# Altium PCB PCB1.PcbDoc
Units mm, origin at the board's own origin, x right, y up, seen from the top; angles counter-clockwise.
Board outline 71.8 x 63.2 mm, 2 copper layers (Top, Bottom), stack 0.498 mm thick; 2 components, 49 nets, 150 pads, 0 vias.
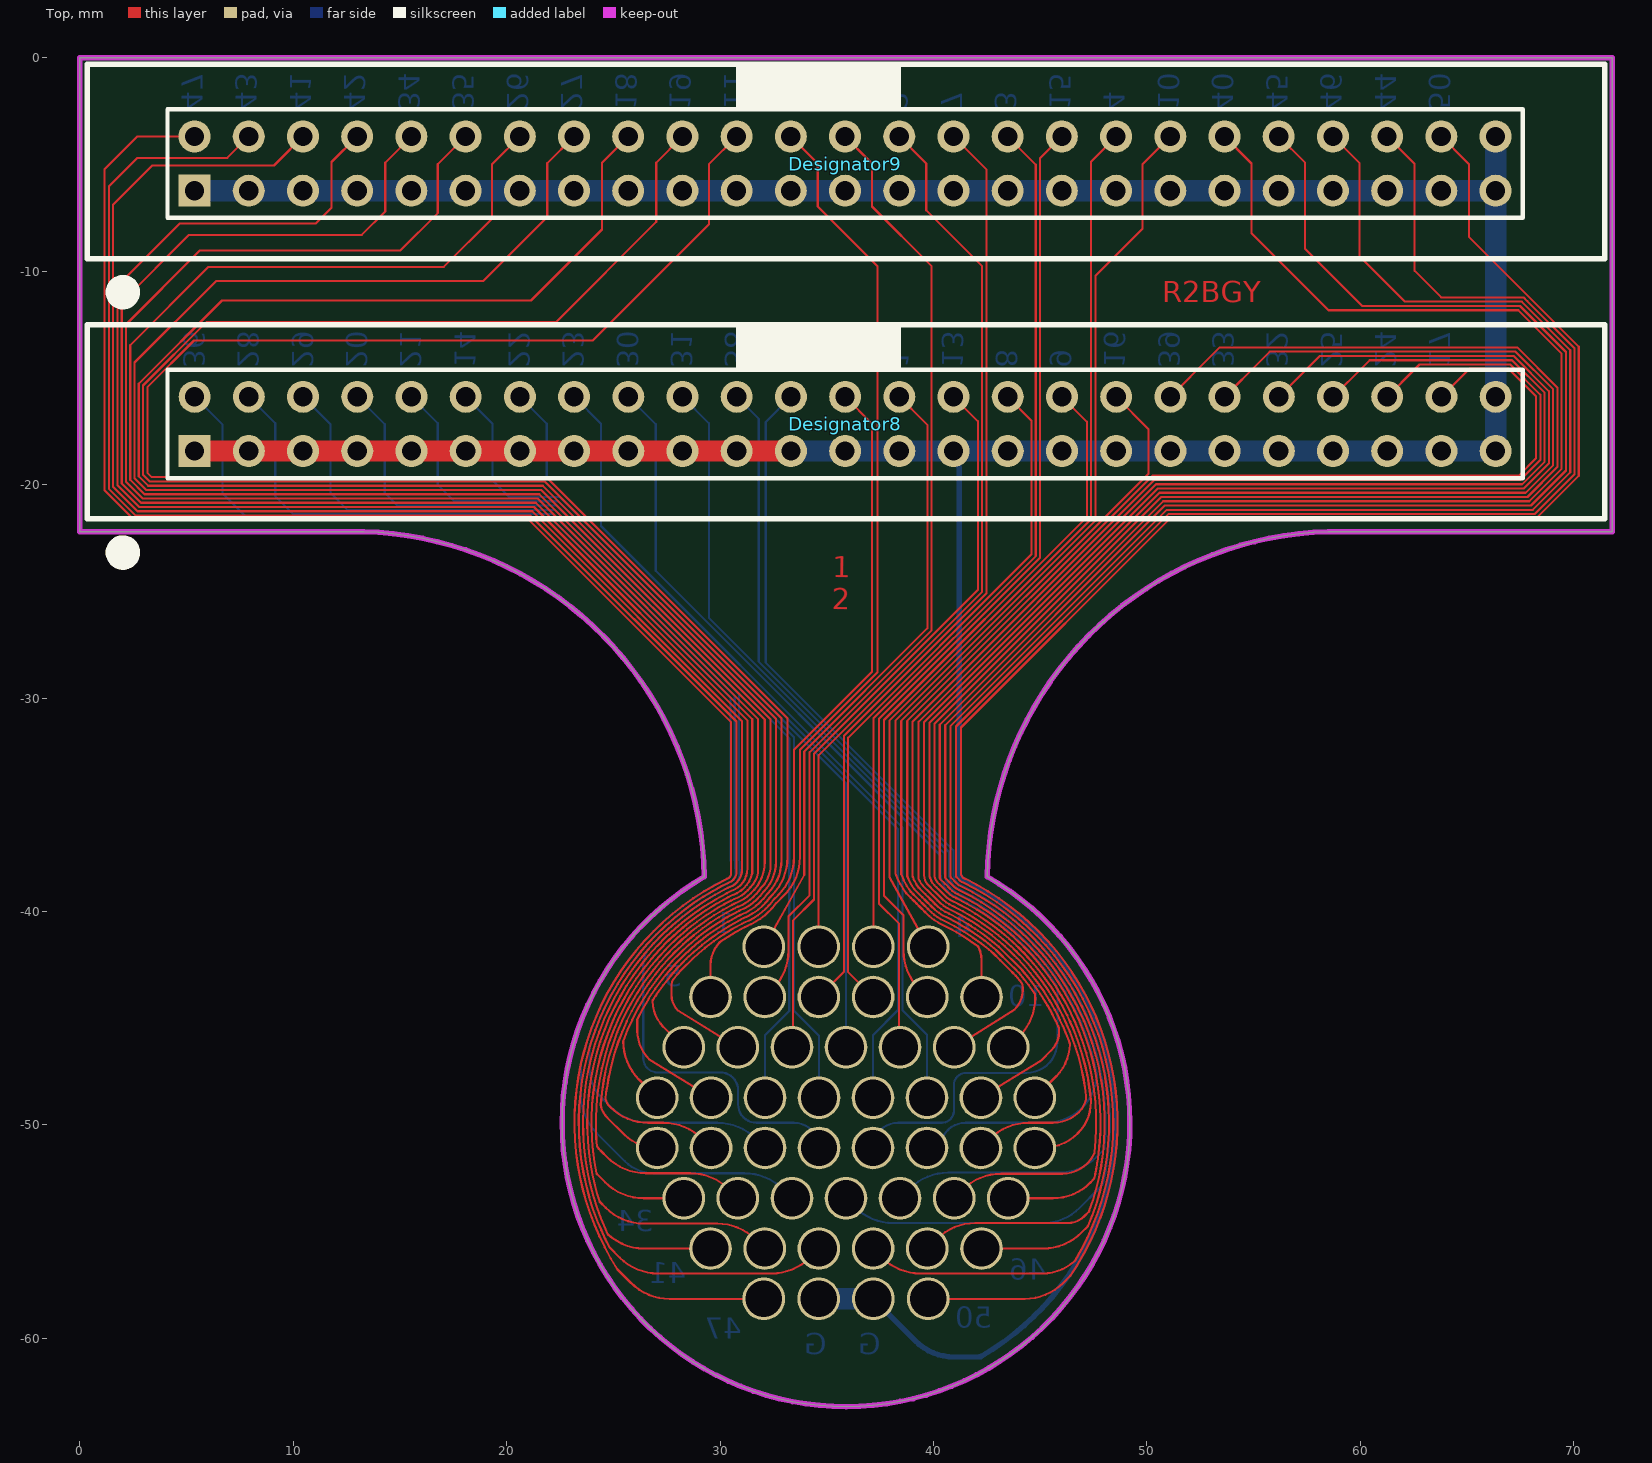
[diagram p0: Top view]
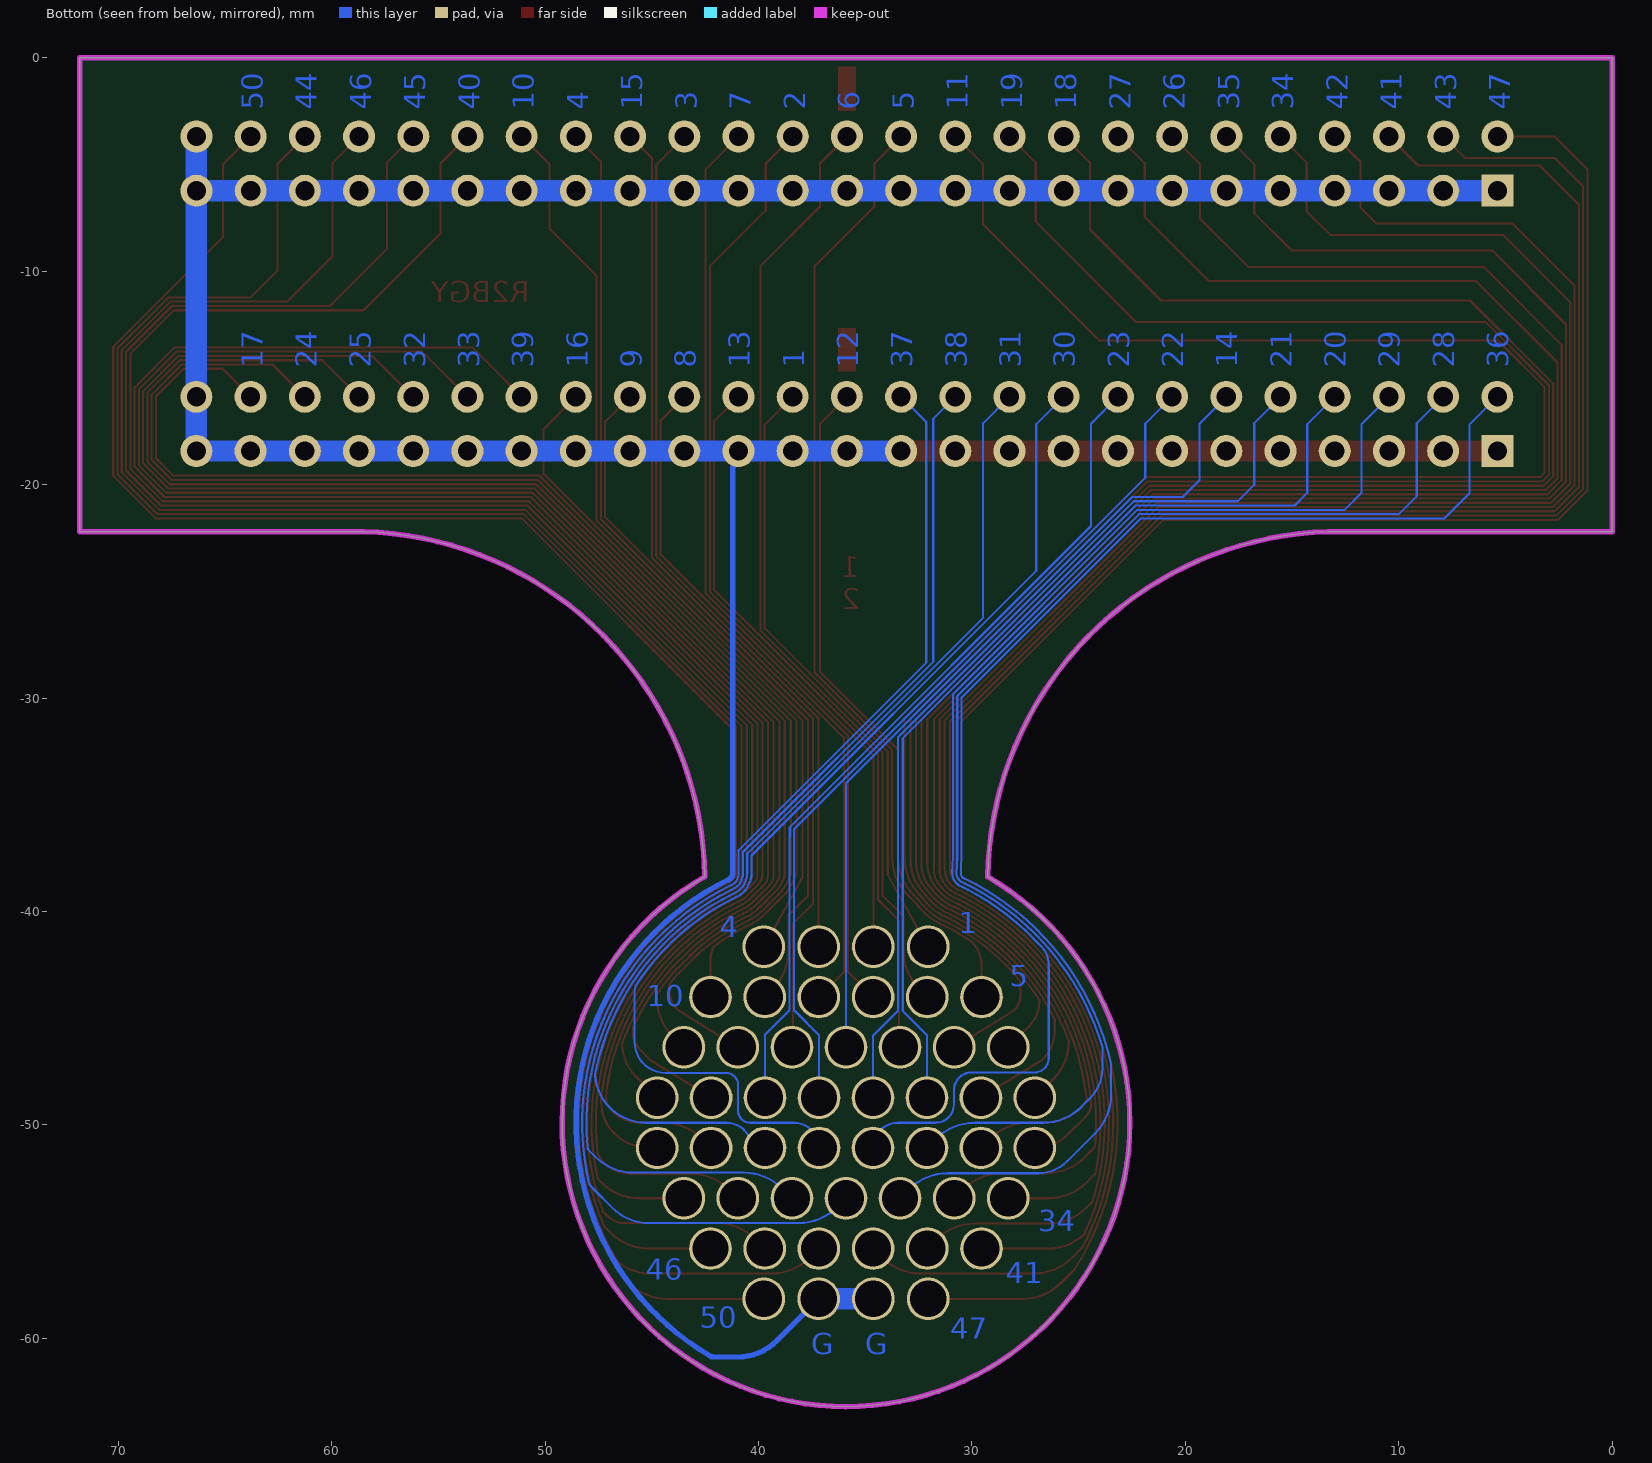
[diagram p1: Bottom view, seen from below]

## Layer stack, top to bottom
Top Solder: solder mask 0.0102, Solder Resist, Dk 3.5
Top: signal copper 0.018
Dielectric 2: prepreg 0.0711, PP-006, Dk 4.1
Dielectric 1: dielectric 0.32, FR-4, Dk 4.8
Dielectric 3: prepreg 0.0711, PP-006, Dk 4.1
Bottom: signal copper 0.018
Bottom Solder: solder mask 0.0102, Solder Resist, Dk 3.5

## Board outline
0,-22.2 0,0 71.8,0 71.8,-22.2 59.2,-22.2 ccw(c58.943,-38.622) 42.521,-38.365 cw(c35.9,-49.9) 29.256,-38.378 ccw(c12.839,-38.617) 12.6,-22.2

## Design rules (kind name [scope] priority, off if disabled: settings)
Clearance [All] p1: gap=0.1 ignorepadtopadclearanceinfootprint=FALSE
PolygonConnect [All] p1: connectstyle=Relief reliefconductorwidth=0.254 reliefentries=4 polygonreliefangle="90 Angle" airgapwidth=0.254
RoutingVias [All] p1: holewidth=0.711 width=1.27 viastyle="Through Hole" minholewidth=0.711 minwidth=1.27 maxholewidth=0.711 maxwidth=1.27
SolderMaskExpansion [All] p1: expansion=0.102 istentingtop=FALSE
Width [All] p1: maxlimit=2 minlimit=0.1 preferedwidth=0.254
30 further rules are at their usual default settings.

## Components (designator, comment, footprint, x,y, rotation, side; value= is the part's Value field where it differs from the comment)
Designator8 "Comment" IDC_DIO 5.379,-18.425 r0 top
Designator9 "Comment" IDC_DIO 5.375,-6.225 r0 top

## Footprints (in the part's own frame and the unit in brackets; to place one, negate y for a bottom-side part, rotate by r counter-clockwise, add the part's x,y. Pads: shape width x height; smd on the part's side, far side on the other; paste and mask are expansions set on the pad)
IDC_DIO [mm]
  rect 1.5x1.5 hole 0.9: 1(0,0)
  round 1.5 hole 0.9: 2(0,2.54) 3(2.54,0) 4(2.54,2.54) 5(5.08,0) 6(5.08,2.54) 7(7.62,0) 8(7.62,2.54) 9(10.16,0) 10(10.16,2.54) 11(12.7,0) 12(12.7,2.54) 13(15.24,0) 14(15.24,2.54) 15(17.78,0) 16(17.78,2.54) 17(20.32,0) 18(20.32,2.54) 19(22.86,0) 20(22.86,2.54) 21(25.4,0) 22(25.4,2.54) 23(27.94,0) 24(27.94,2.54) 25(30.48,0) 26(30.48,2.54) 27(33.02,0) 28(33.02,2.54) 29(35.56,0) 30(35.56,2.54) 31(38.1,0) 32(38.1,2.54) 33(40.64,0) 34(40.64,2.54) 35(43.18,0) 36(43.18,2.54) 37(45.72,0) 38(45.72,2.54) 39(48.26,0) 40(48.26,2.54) 41(50.8,0) 42(50.8,2.54) 43(53.34,0) 44(53.34,2.54) 45(55.88,0) 46(55.88,2.54) 47(58.42,0) 48(58.42,2.54) 49(60.96,0) 50(60.96,2.54)
  silkscreen extent -5.03,-5.14 66.07,5.92

## Free pads (board coordinates)
  round 2 hole 1.7: 1(32.05,-41.65) 2(34.617,-41.65) 3(37.183,-41.65) 4(39.75,-41.65) 5(29.55,-44.007) 6(32.09,-44.007) 7(34.63,-44.007) 8(37.17,-44.007) 9(39.71,-44.007) 10(42.25,-44.007) 11(28.3,-46.364) 12(30.833,-46.364) 13(33.367,-46.364) 14(35.9,-46.364) 15(38.433,-46.364) 16(40.967,-46.364) 17(43.5,-46.364) 18(27.05,-48.721) 19(29.579,-48.721) 20(32.107,-48.721) 21(34.636,-48.721) 22(37.164,-48.721) 23(39.693,-48.721) 24(42.221,-48.721) 25(44.75,-48.721) 26(27.05,-51.079) 27(29.579,-51.079) 28(32.107,-51.079) 29(34.636,-51.079) 30(37.164,-51.079) 31(39.693,-51.079) 32(42.221,-51.079) 33(44.75,-51.079) 34(28.3,-53.436) 35(30.833,-53.436) 36(33.367,-53.436) 37(35.9,-53.436) 38(38.433,-53.436) 39(40.967,-53.436) 40(43.5,-53.436) 41(29.55,-55.793) 42(32.09,-55.793) 43(34.63,-55.793) 44(37.17,-55.793) 45(39.71,-55.793) 46(42.25,-55.793) 47(32.05,-58.15) 48(34.617,-58.15) 49(37.183,-58.15) 50(39.75,-58.15)

## Nets (pads, with @x,y where several pads share a name; then routed paths per layer and width w, separated by ;. In a path a pad name is that pad's centre, name@x,y a point inside that pad or via, vN(x,y) a via of type N, cw(c..) or ccw(c..) an arc to the next point about the centre after c; other vN are vias at no path point)
1: Designator8.28 pad.1 | length 29.4
  Top w0.1: pad.1 33.944,-38.292 33.944,-32.501 39.713,-26.732 39.713,-17.199 Designator8.28@38.244,-15.73
2: Designator9.28 pad.2 | length 42.9
  Top w0.1: pad.2 34.617,-32.678 42.279,-25.016 42.279,-9.767 39.659,-7.147 39.659,-4.949 Designator9.28@38.252,-3.542
3: Designator9.32 pad.3 | length 42
  Top w0.1: pad.3 37.183,-30.959 44.793,-23.35 44.793,-5.003 Designator9.32@43.239,-3.449
4: Designator9.36 pad.4 | length 42.8
  Top w0.1: 37.944,-38.39 cw(c38.032,-38.343) 37.932,-38.343 37.932,-31.059 47.384,-21.607 47.384,-4.856 Designator9.36 ; 37.945,-38.391 pad.4
5: Designator9.24 pad.5 | length 45.4
  Top w0.1: pad.5 29.55,-42.52 cw(c31.111,-42.52) 29.977,-41.448 cw(c30.049,-41.517) 29.991,-41.435 cw(c35.9,-49.9) 30.353,-41.194 cw(c35.9,-49.9) 31.117,-40.752 ccw(c30.266,-39.053) 31.147,-40.736 cw(c35.9,-49.9) 31.218,-40.7 cw(c31.262,-40.79) 31.225,-40.697 ccw(c30.145,-37.903) 32.271,-40.013 cw(c32.341,-40.084) 32.274,-40.01 ccw(c30.098,-37.675) 32.648,-39.595 32.997,-39.246 ccw(c31.201,-37.45) 33.741,-37.45 33.741,-32.422 37.373,-28.79 37.373,-9.763 34.579,-6.969 34.579,-4.949 Designator9.24
6: Designator9.26 pad.6 | length 45.4
  Top w0.1: pad.6 32.464,-43.633 ccw(c30.668,-41.837) 33.208,-41.837 33.208,-40.223 34.198,-39.232 34.198,-32.53 39.913,-26.815 39.913,-9.763 37.119,-6.969 37.119,-4.949 Designator9.26@35.696,-3.526
7: Designator9.30 pad.7 | length 44.6
  Top w0.1: pad.7 35.802,-42.836 35.802,-31.775 42.479,-25.098 42.479,-5.229 Designator9.30@40.674,-3.424
8: Designator8.32 pad.8 | length 32.6
  Top w0.1: pad.8 36.002,-42.839 36.002,-31.858 44.593,-23.267 44.593,-16.999 Designator8.32
9: Designator8.34 pad.9 | length 33.5
  Top w0.1: pad.9 39.336,-43.633 cw(c41.132,-41.837) 38.592,-41.837 38.592,-40.172 37.678,-39.257 37.678,-31.03 47.184,-21.524 47.184,-17.05 Designator8.34@45.88,-15.746
10: Designator9.38 pad.10 | length 47.8
  Top w0.1: 39.191,-39.613 ccw(c39.618,-39.191) 39.196,-39.618 39.218,-39.64 ccw(c39.289,-39.57) 39.219,-39.641 39.365,-39.786 ; 39.19,-39.612 39.088,-39.51 38.942,-39.363 cw(c39.081,-39.22) 38.939,-39.361 ccw(c38.867,-39.431) 38.937,-39.359 cw(c39.076,-39.216) 38.934,-39.356 38.741,-39.163 38.738,-39.16 ccw(c38.666,-39.23) 38.736,-39.158 cw(c41.709,-36.904) 38.217,-38.218 cw(c38.311,-38.184) 38.211,-38.186 38.211,-31.063 47.584,-21.69 47.584,-10.225 49.794,-8.015 49.794,-4.986 Designator9.38@51.26,-3.52 ; 39.365,-39.787 cw(c39.293,-39.857) 39.366,-39.788 ccw(c40.754,-38.491) 39.39,-39.814 ccw(c39.683,-39.54) 39.4,-39.824 39.408,-39.832 cw(c39.338,-39.903) 39.41,-39.833 cw(c39.341,-39.906) 39.413,-39.836 39.568,-39.992 cw(c39.498,-40.063) 39.569,-39.993 ccw(c39.999,-39.574) 39.578,-40.001 39.613,-40.036 ccw(c40.04,-39.615) 39.616,-40.039 cw(c39.545,-40.11) 39.617,-40.041 ccw(c41.56,-38.199) 40.478,-40.648 cw(c40.437,-40.739) 40.48,-40.649 cw(c35.9,-49.9) 40.856,-40.844 cw(c35.9,-49.9) 41.302,-41.103 ccw(c41.517,-40.766) 41.307,-41.106 ccw(c42.221,-39.673) 41.349,-41.132 cw(c35.9,-49.9) 42.087,-41.636 cw(c42.026,-41.716) 42.116,-41.673 cw(c40.802,-42.28) 42.25,-42.28 pad.10
11: Designator9.22 pad.11 | length 91.7
  Top w0.1: pad.11 27.352,-45.417 cw(c28.611,-44.16) 26.833,-44.206 cw(c26.933,-44.205) 26.848,-44.152 cw(c35.9,-49.9) 26.974,-43.958 ccw(c26.826,-43.81) 27.016,-43.897 cw(c27.107,-43.939) 27.024,-43.884 cw(c35.9,-49.9) 28.028,-42.619 ccw(c27.157,-41.776) 28.062,-42.583 cw(c35.9,-49.9) 28.419,-42.218 cw(c35.9,-49.9) 29.155,-41.564 ccw(c28.592,-40.862) 29.162,-41.558 cw(c35.9,-49.9) 30.935,-40.396 ccw(c30.266,-39.053) 30.962,-40.382 cw(c35.9,-49.9) 31.055,-40.334 cw(c31.1,-40.424) 31.064,-40.33 ccw(c30.145,-37.903) 31.992,-39.726 cw(c32.063,-39.797) 31.995,-39.724 ccw(c30.098,-37.675) 32.34,-39.339 cw(c32.42,-39.399) 32.348,-39.33 ccw(c30.625,-37.661) 32.363,-39.314 32.413,-39.264 ccw(c30.617,-37.468) 33.157,-37.468 33.157,-30.943 32.377,-30.163 21.863,-19.649 3.365,-19.649 3.162,-19.446 3.162,-15.436 5.351,-13.248 24.038,-13.248 29.474,-7.812 29.474,-4.986 Designator9.22
12: Designator8.26 pad.12 | length 36.8
  Top w0.1: pad.12 28.026,-44.642 cw(c28.762,-43.906) 27.721,-43.906 27.721,-43.564 cw(c28.675,-43.564) 27.796,-43.194 cw(c27.888,-43.233) 27.811,-43.169 cw(c35.9,-49.9) 28.173,-42.757 ccw(c27.157,-41.776) 28.209,-42.718 28.717,-42.21 cw(c28.787,-42.281) 28.718,-42.209 cw(c35.9,-49.9) 29.28,-41.72 ccw(c28.592,-40.862) 29.288,-41.714 cw(c35.9,-49.9) 31.026,-40.574 ccw(c30.266,-39.053) 31.055,-40.559 cw(c35.9,-49.9) 31.136,-40.517 cw(c31.181,-40.607) 31.145,-40.513 ccw(c30.145,-37.903) 32.132,-39.87 cw(c32.202,-39.94) 32.134,-39.868 ccw(c30.098,-37.675) 32.496,-39.464 32.718,-39.242 ccw(c30.922,-37.446) 33.462,-37.446 33.462,-32.418 37.119,-28.761 37.119,-17.145 Designator8.26
13: Designator8.30 pad.13 | length 34.7
  Top w0.1: pad.13 33.411,-46.32 33.411,-40.426 34.401,-39.435 34.401,-32.61 42.079,-24.933 42.079,-17.024 Designator8.30@40.805,-15.751
14: Designator8.12 pad.14 | length 39.5
  Bottom w0.1: Designator8.12@17.933,-15.739 19.339,-17.145 19.339,-19.801 20.117,-20.579 22.495,-20.579 35.9,-33.984 pad.14
15: Designator9.34 pad.15 | length 46.6
  Top w0.1: pad.15 38.389,-46.32 38.389,-40.578 37.449,-39.638 37.449,-30.976 44.993,-23.432 44.993,-4.707 Designator9.34
16: Designator8.36 pad.16 | length 41
  Top w0.1: 39.36,-39.499 39.337,-39.476 cw(c39.618,-39.191) 39.333,-39.472 39.082,-39.221 ccw(c39.011,-39.292) 39.081,-39.22 39.078,-39.217 ccw(c39.007,-39.287) 39.076,-39.216 39.027,-39.166 38.92,-39.059 38.915,-39.054 cw(c41.395,-37.21) 38.491,-38.267 38.491,-31.066 50.073,-19.484 50.073,-17.399 Designator8.36 ; 39.361,-39.5 39.508,-39.647 cw(c39.437,-39.718) 39.51,-39.649 ccw(c40.754,-38.491) 39.536,-39.676 ccw(c39.683,-39.54) 39.542,-39.683 39.55,-39.691 ccw(c39.693,-39.551) 39.552,-39.693 ccw(c39.695,-39.553) 39.554,-39.694 ccw(c39.625,-39.625) 39.555,-39.696 39.711,-39.852 ccw(c39.999,-39.574) 39.718,-39.859 ; 39.719,-39.859 39.755,-39.895 ccw(c40.04,-39.615) 39.759,-39.9 39.76,-39.901 ccw(c41.56,-38.199) 40.185,-40.259 ccw(c41.56,-38.199) 40.563,-40.466 cw(c40.521,-40.558) 40.565,-40.467 cw(c35.9,-49.9) 41.408,-40.934 ccw(c41.517,-40.766) 41.413,-40.937 ccw(c42.221,-39.673) 41.453,-40.962 cw(c35.9,-49.9) 42.605,-41.79 cw(c35.9,-49.9) 42.785,-41.942 cw(c42.72,-42.018) 42.79,-41.947 43.13,-42.286 43.674,-42.831 ; pad.16@41.493,-45.838 pad.16 43.799,-44.591 43.803,-44.588 ccw(c42.893,-43.677) 44.18,-43.677 44.18,-43.552 ccw(c43.747,-43.552) 44.121,-43.332 ccw(c44.035,-43.384) 44.114,-43.322 ccw(c35.9,-49.9) 44.021,-43.208 ccw(c35.9,-49.9) 43.858,-43.015 ccw(c43.782,-43.08) 43.854,-43.01 43.675,-42.831
17: Designator8.48 pad.17 | length 62
  Top w0.1: 39.854,-39.712 39.695,-39.553 ccw(c39.623,-39.622) 39.693,-39.551 39.683,-39.54 ccw(c39.608,-39.607) 39.682,-39.539 ccw(c39.608,-39.607) 39.68,-39.538 cw(c40.754,-38.491) 39.677,-39.535 cw(c40.754,-38.491) 39.654,-39.51 ccw(c39.581,-39.579) 39.652,-39.508 39.478,-39.334 cw(c39.618,-39.191) 39.475,-39.331 39.222,-39.078 39.096,-38.952 cw(c41.085,-37.511) 38.77,-38.332 38.77,-31.07 50.261,-19.579 67.415,-19.579 68.234,-18.76 68.234,-15.864 66.939,-14.569 65.116,-14.569 Designator8.48@63.607,-16.077 ; 39.855,-39.712 ccw(c39.999,-39.574) 39.859,-39.717 39.897,-39.755 ; 39.897,-39.755 ccw(c40.04,-39.615) 39.901,-39.759 ccw(c40.045,-39.62) 39.903,-39.761 cw(c39.832,-39.832) 39.905,-39.762 ccw(c41.56,-38.199) 40.646,-40.285 cw(c40.606,-40.376) 40.65,-40.286 cw(c35.9,-49.9) 41.514,-40.764 ccw(c41.623,-40.596) 41.517,-40.766 ; 41.517,-40.766 cw(c41.466,-40.852) 41.519,-40.767 41.521,-40.769 ccw(c42.221,-39.673) 41.557,-40.791 cw(c35.9,-49.9) 41.895,-41.009 cw(c35.9,-49.9) 42.416,-41.384 ; 42.369,-41.348 cw(c35.9,-49.9) 42.922,-41.796 cw(c42.856,-41.871) 42.927,-41.801 43.616,-42.489 ; pad.17 44.021,-45.844 ccw(c42.225,-44.048) 44.765,-44.048 ccw(c43.257,-44.048) 44.754,-43.871 ccw(c44.655,-43.884) 44.738,-43.827 ccw(c35.9,-49.9) 44.175,-43.08 ccw(c35.9,-49.9) 44.004,-42.878 ccw(c43.929,-42.944) 44.002,-42.876 ccw(c43.929,-42.944) 44,-42.874 ; 43.999,-42.873 43.815,-42.689 ; 43.616,-42.489 43.815,-42.689 ; 43.616,-42.489 43.815,-42.689
18: Designator9.18 pad.18 | length 89.8
  Top w0.1: Designator9.18 24.47,-4.91 24.47,-8.041 21.143,-11.368 6.665,-11.368 2.762,-15.27 2.762,-19.612 3.199,-20.049 21.697,-20.049 32.623,-30.975 32.623,-37.661 cw(c30.625,-37.661) 32.038,-39.074 cw(c30.098,-37.675) 31.715,-39.438 cw(c30.145,-37.903) 30.904,-39.963 ccw(c30.939,-40.057) 30.894,-39.967 ccw(c35.9,-49.9) 30.776,-40.028 cw(c30.266,-39.053) 30.754,-40.039 ccw(c35.9,-49.9) 29.542,-40.773 ccw(c35.9,-49.9) 28.91,-41.248 cw(c28.592,-40.862) 28.904,-41.253 ccw(c35.9,-49.9) 27.766,-42.314 cw(c27.157,-41.776) 27.738,-42.344 ; pad.18 26.203,-47.875 cw(c28.001,-46.08) 25.461,-46.078 cw(c25.561,-46.079) 25.467,-46.044 cw(c35.9,-49.9) 26.132,-44.579 cw(c35.9,-49.9) 27.737,-42.345
19: Designator9.20 pad.19 | length 93
  Top w0.1: Designator9.20 27.01,-4.91 27.01,-7.685 22.311,-12.384 5.931,-12.384 2.962,-15.353 2.962,-19.529 3.282,-19.849 21.78,-19.849 32.295,-30.363 32.877,-30.946 32.877,-37.587 cw(c30.632,-37.587) 32.22,-39.174 cw(c30.625,-37.661) 32.195,-39.199 ccw(c32.267,-39.269) 32.187,-39.209 cw(c30.098,-37.675) 31.855,-39.58 ccw(c31.924,-39.653) 31.853,-39.582 cw(c30.145,-37.903) 30.983,-40.147 ccw(c31.019,-40.24) 30.975,-40.151 ccw(c35.9,-49.9) 30.869,-40.205 cw(c30.266,-39.053) 30.845,-40.217 ccw(c35.9,-49.9) 29.453,-41.083 ccw(c35.9,-49.9) 29.036,-41.403 cw(c28.592,-40.862) 29.028,-41.409 ccw(c35.9,-49.9) 27.914,-42.448 cw(c27.157,-41.776) 27.882,-42.482 ccw(c35.9,-49.9) 27.289,-43.18 ccw(c35.9,-49.9) 26.125,-45.025 ccw(c26.221,-45.054) 26.121,-45.054 26.121,-45.579 ccw(c28.029,-45.579) 26.68,-46.928 pad.19
20: Designator8.8 pad.20 | length 46.3
  Bottom w0.1: Designator8.8@12.835,-15.721 14.285,-17.17 14.285,-20.385 14.878,-20.979 22.329,-20.979 33.24,-31.89 33.24,-44.661 32.107,-45.793 pad.20
21: Designator8.10 pad.21 | length 43.9
  Bottom w0.1: Designator8.10@15.345,-15.691 16.774,-17.12 16.774,-20.004 17.549,-20.779 22.412,-20.779 33.467,-31.834 33.467,-44.647 34.636,-45.816 pad.21
22: Designator8.14 pad.22 | length 40.9
  Bottom w0.1: Designator8.14@20.472,-15.738 21.879,-17.145 21.879,-19.681 38.338,-36.14 38.338,-44.617 37.164,-45.791 pad.22
23: Designator8.16 pad.23 | length 39.7
  Bottom w0.1: Designator8.16 24.419,-17.145 24.419,-21.938 37.51,-35.029 38.538,-36.057 38.538,-36.486 38.542,-36.489 38.542,-44.617 39.693,-45.768 pad.23
24: Designator8.46 pad.24 | length 69.7
  Top w0.1: 39.363,-38.936 cw(c39.503,-38.793) 39.36,-38.933 39.31,-38.883 cw(c39.375,-38.816) 39.29,-38.854 ccw(c39.198,-38.895) 39.278,-38.835 cw(c40.597,-37.819) 39.03,-38.38 cw(c40.597,-37.819) 39.024,-38.364 39.024,-31.098 50.344,-19.779 67.498,-19.779 68.434,-18.842 68.434,-15.864 68.434,-15.781 67.022,-14.369 62.776,-14.369 Designator8.46@61.084,-16.06 ; 39.363,-38.937 39.617,-39.191 ; 39.618,-39.192 39.797,-39.371 ccw(c40.754,-38.491) 39.836,-39.411 39.997,-39.571 ; 39.997,-39.572 ccw(c40.14,-39.432) 39.998,-39.573 cw(c39.929,-39.645) 40,-39.575 40.039,-39.614 cw(c39.969,-39.685) 40.04,-39.615 40.042,-39.617 ccw(c40.185,-39.477) 40.045,-39.62 ; 40.045,-39.62 cw(c39.975,-39.692) 40.048,-39.623 ccw(c41.56,-38.199) 40.729,-40.102 cw(c40.69,-40.195) 40.734,-40.105 cw(c35.9,-49.9) 41.622,-40.596 ; 41.623,-40.596 cw(c41.571,-40.682) 41.624,-40.597 41.628,-40.6 ccw(c42.221,-39.673) 41.661,-40.619 cw(c35.9,-49.9) 41.823,-40.723 cw(c35.9,-49.9) 42.092,-40.902 cw(c35.9,-49.9) 42.643,-41.307 cw(c35.9,-49.9) 43.058,-41.649 cw(c42.992,-41.725) 43.062,-41.653 44.146,-42.737 cw(c44.075,-42.808) 44.15,-42.742 cw(c35.9,-49.9) 45.249,-44.252 ccw(c46.085,-43.851) 45.331,-44.39 cw(c45.25,-44.448) 45.336,-44.397 cw(c35.9,-49.9) 45.566,-44.813 ; pad.24@42.884,-48.059 pad.24 45.044,-46.979 45.523,-46.5 ccw(c44.656,-45.633) 45.882,-45.633 45.882,-45.512 ccw(c45.622,-45.512) 45.876,-45.457 ccw(c45.779,-45.479) 45.87,-45.438 ccw(c35.9,-49.9) 45.845,-45.383 ccw(c45.754,-45.425) 45.843,-45.378 45.831,-45.356 cw(c45.92,-45.309) 45.827,-45.347 45.816,-45.319 ccw(c45.723,-45.356) 45.814,-45.315 ccw(c35.9,-49.9) 45.734,-45.146 cw(c47.046,-44.419) 45.67,-45.016 ccw(c45.579,-45.057) 45.669,-45.013 ccw(c35.9,-49.9) 45.499,-44.687
25: Designator8.44 pad.25 | length 70.4
  Top w0.1: 40.14,-39.432 ccw(c40.068,-39.501) 40.139,-39.431 39.978,-39.27 cw(c40.754,-38.491) 39.943,-39.234 ccw(c39.87,-39.302) 39.94,-39.23 39.857,-39.148 39.503,-38.793 cw(c40.267,-38.117) 39.304,-38.453 39.304,-31.102 50.426,-19.979 67.58,-19.979 68.634,-18.925 68.634,-15.864 68.634,-15.698 67.104,-14.169 60.436,-14.169 Designator8.44@58.451,-16.153 ; 40.141,-39.433 40.181,-39.474 ccw(c40.324,-39.333) 40.183,-39.476 cw(c40.114,-39.547) 40.185,-39.477 40.188,-39.48 cw(c40.119,-39.552) 40.191,-39.483 ccw(c41.56,-38.199) 40.814,-39.921 cw(c40.774,-40.013) 40.817,-39.923 cw(c35.9,-49.9) 41.728,-40.426 cw(c41.675,-40.511) 41.73,-40.427 41.736,-40.431 ccw(c42.221,-39.673) 41.764,-40.448 cw(c35.9,-49.9) 42.743,-41.131 cw(c35.9,-49.9) 43.622,-41.895 cw(c43.553,-41.967) 43.624,-41.896 43.768,-42.04 ; 43.769,-42.041 ccw(c44.054,-41.76) 43.773,-42.045 43.903,-42.175 ; 43.903,-42.175 cw(c35.9,-49.9) 44.534,-42.888 cw(c35.9,-49.9) 45.423,-44.153 cw(c45.338,-44.205) 45.428,-44.161 ccw(c46.085,-43.851) 45.497,-44.279 cw(c45.417,-44.339) 45.503,-44.288 cw(c35.9,-49.9) 45.85,-44.928 cw(c45.76,-44.972) 45.852,-44.932 ccw(c47.046,-44.419) 45.911,-45.052 cw(c45.823,-45.1) 45.913,-45.055 cw(c35.9,-49.9) 46.191,-45.679 ccw(c46.377,-45.606) 46.192,-45.682 46.198,-45.696 ccw(c46.384,-45.623) 46.199,-45.7 46.2,-45.702 ccw(c46.386,-45.628) 46.201,-45.705 46.208,-45.72 cw(c46.116,-45.759) 46.208,-45.721 cw(c35.9,-49.9) 46.295,-45.942 cw(c35.9,-49.9) 46.384,-46.185 cw(c46.29,-46.218) 46.39,-46.219 cw(c44.242,-46.192) 45.761,-47.71 pad.25
26: Designator9.14 pad.26 | length 89.3
  Top w0.1: Designator9.14@20.769,-3.531 19.314,-4.986 19.314,-7.533 17.053,-9.793 6.03,-9.793 2.362,-13.461 2.362,-19.778 3.034,-20.449 21.532,-20.449 32.09,-31.007 32.09,-37.675 cw(c30.098,-37.675) 31.436,-39.15 cw(c30.145,-37.903) 30.746,-39.595 ccw(c30.78,-39.689) 30.736,-39.599 ccw(c35.9,-49.9) 30.591,-39.673 cw(c30.266,-39.053) 30.574,-39.682 ccw(c30.618,-39.772) 30.572,-39.683 ccw(c35.9,-49.9) 29.715,-40.177 ccw(c35.9,-49.9) 28.656,-40.939 cw(c28.592,-40.862) 28.653,-40.941 ccw(c35.9,-49.9) 27.469,-42.046 cw(c27.157,-41.776) 27.448,-42.068 ccw(c35.9,-49.9) 26.646,-43.034 ccw(c35.9,-49.9) 25.667,-44.602 ccw(c35.9,-49.9) 24.658,-47.369 ccw(c35.9,-49.9) 24.409,-49.048 ccw(c24.508,-49.054) 24.41,-49.07 ccw(c25.498,-48.884) 24.716,-49.664 25.481,-50.429 ccw(c27.05,-48.86) pad.26
27: Designator9.16 pad.27 | length 93
  Top w0.1: Designator9.16 21.905,-4.935 21.905,-7.457 18.907,-10.454 6.385,-10.454 2.562,-14.277 2.562,-19.695 3.116,-20.249 21.614,-20.249 32.369,-31.004 32.369,-37.81 cw(c30.84,-37.81) 31.922,-38.891 cw(c30.098,-37.675) 31.577,-39.292 ccw(c31.645,-39.366) 31.574,-39.295 cw(c30.145,-37.903) 30.825,-39.779 ccw(c30.859,-39.873) 30.815,-39.783 ccw(c35.9,-49.9) 30.683,-39.851 cw(c30.266,-39.053) 30.663,-39.861 ccw(c35.9,-49.9) 29.596,-40.494 ccw(c35.9,-49.9) 28.783,-41.093 cw(c28.592,-40.862) 28.778,-41.097 ccw(c35.9,-49.9) 28.271,-41.533 ccw(c35.9,-49.9) 27.618,-42.179 ccw(c27.692,-42.246) 27.617,-42.18 cw(c27.157,-41.776) 27.592,-42.206 ccw(c35.9,-49.9) 26.668,-43.344 ccw(c35.9,-49.9) 25.86,-44.664 ccw(c35.9,-49.9) 25.229,-46.113 ccw(c35.9,-49.9) 24.692,-48.288 ccw(c35.9,-49.9) 24.636,-48.748 ccw(c24.735,-48.757) 24.637,-48.776 ccw(c25.358,-48.63) 24.839,-49.151 24.851,-49.163 ccw(c26.629,-47.385) 26.629,-49.9 27.348,-49.9 cw(c27.348,-52.44) 29.144,-50.644 pad.27
28: Designator8.4 pad.28 | length 61
  Bottom w0.1: Designator8.4@7.792,-15.758 9.154,-17.12 9.154,-20.538 9.995,-21.379 22.163,-21.379 30.688,-29.904 30.688,-37.457 ccw(c30.788,-37.456) 30.688,-37.462 cw(c13.311,-38.573) 30.719,-38.191 cw(c30.242,-38.201) 30.392,-38.654 ccw(c30.424,-38.749) 30.381,-38.659 ccw(c35.9,-49.9) 24.436,-44.86 ccw(c35.9,-49.9) 23.89,-46.353 ccw(c23.986,-46.381) 23.886,-46.38 23.886,-47.347 ccw(c25.88,-47.347) 24.47,-48.757 24.869,-49.156 ccw(c26.665,-47.36) 26.665,-49.9 29.876,-49.9 cw(c29.876,-52.44) 31.673,-50.644 pad.28
29: Designator8.6 pad.29 | length 58.5
  Bottom w0.1: Designator8.6@10.292,-15.718 11.745,-17.17 11.745,-20.385 12.538,-21.179 22.246,-21.179 30.888,-29.821 30.888,-37.45 ccw(c30.988,-37.45) 30.888,-37.455 cw(c13.311,-38.573) 30.919,-38.186 cw(c30.242,-38.201) 30.467,-38.84 ccw(c30.501,-38.934) 30.458,-38.844 ccw(c35.9,-49.9) 30.186,-38.982 ccw(c35.9,-49.9) 27.505,-40.879 ccw(c27.573,-40.952) 27.503,-40.88 26.881,-41.503 ; 26.88,-41.504 ccw(c35.9,-49.9) 26.638,-41.772 ccw(c26.713,-41.837) 26.631,-41.781 ccw(c27.747,-42.534) 26.4,-42.534 26.4,-46.877 ccw(c27.061,-46.877) 27.061,-47.538 30.007,-47.538 cw(c30.007,-48.376) 30.845,-48.376 30.845,-49.036 ccw(c31.709,-49.036) 31.709,-49.9 33.457,-49.9 cw(c33.457,-51.079) pad.29
30: Designator8.18 pad.30 | length 51
  Bottom w0.1: Designator8.18@25.53,-15.716 26.985,-17.17 26.985,-24.032 40.329,-37.376 40.329,-37.679 ccw(c40.829,-37.68) 40.329,-37.68 40.329,-38.184 ccw(c41.56,-38.199) 41.071,-39.329 41.084,-39.334 ; pad.30 cw(c38.343,-51.079) 38.343,-49.9 40.396,-49.9 ccw(c40.396,-49.341) 40.955,-49.341 40.955,-48.132 cw(c41.523,-48.132) 41.523,-47.563 44.358,-47.563 ccw(c44.358,-46.115) 45.806,-46.115 45.806,-43.779 ccw(c44.841,-43.779) 45.763,-43.494 45.758,-43.479 ccw(c45.663,-43.509) 45.747,-43.454 ccw(c35.9,-49.9) 44.497,-41.862 ccw(c35.9,-49.9) 44.38,-41.739 44.061,-41.42 ccw(c35.9,-49.9) 41.088,-39.336 ccw(c41.044,-39.426) 41.084,-39.334
31: Designator8.20 pad.31 | length 49.5
  Bottom w0.1: Designator8.20 29.474,-17.12 29.474,-26.238 40.529,-37.293 40.529,-37.679 ; pad.31 40.225,-51.079 40.263,-51.079 40.291,-51.054 ccw(c40.225,-50.979) pad.31@40.301,-51.044 ; pad.31@40.302,-51.043 40.321,-51.02 40.325,-50.989 ccw(c40.225,-50.979) 40.325,-50.987 cw(c41.5,-51.079) 41.5,-49.9 45.273,-49.9 ccw(c45.273,-47.512) 47.655,-47.665 ccw(c47.556,-47.659) 47.654,-47.64 ccw(c35.9,-49.9) 47.321,-46.319 ccw(c35.9,-49.9) 43.638,-40.769 ccw(c35.9,-49.9) 41.17,-39.154 ccw(c41.127,-39.244) 41.165,-39.152 cw(c41.56,-38.199) 40.529,-38.185 40.529,-37.68
32: Designator8.42 pad.32 | length 78.8
  Top w0.1: 40.31,-39.319 ccw(c40.595,-39.039) 40.313,-39.323 40.324,-39.333 cw(c40.254,-39.405) 40.325,-39.334 40.333,-39.342 cw(c40.262,-39.413) 40.335,-39.344 ccw(c41.56,-38.199) 40.888,-39.736 40.896,-39.739 cw(c40.856,-39.831) 40.897,-39.74 cw(c40.858,-39.832) 40.902,-39.742 cw(c35.9,-49.9) 41.835,-40.257 ; 40.31,-39.319 40.119,-39.128 cw(c40.754,-38.491) 40.088,-39.096 ccw(c40.014,-39.163) 40.085,-39.092 39.717,-38.725 39.714,-38.722 cw(c40.237,-38.287) 39.558,-38.314 cw(c39.658,-38.311) 39.558,-38.312 39.558,-31.131 50.509,-20.179 67.663,-20.179 68.834,-19.008 68.834,-15.864 68.834,-15.615 67.187,-13.969 58.096,-13.969 Designator8.42@55.844,-16.22 ; 41.836,-40.258 41.843,-40.262 ccw(c42.221,-39.673) 41.868,-40.277 cw(c35.9,-49.9) 43.763,-41.752 cw(c43.693,-41.824) 43.764,-41.753 43.91,-41.9 ; pad.32 42.656,-50.644 cw(c44.452,-52.44) 44.452,-49.9 45.596,-49.9 ccw(c45.596,-48.166) 46.822,-49.392 46.847,-49.367 ccw(c46.11,-48.63) 47.152,-48.641 ccw(c47.052,-48.641) 47.152,-48.63 ccw(c35.9,-49.9) 47.102,-48.25 ccw(c35.9,-49.9) 46.639,-46.312 ccw(c35.9,-49.9) 46.393,-45.645 46.386,-45.628 cw(c46.478,-45.589) 46.385,-45.627 46.384,-45.623 46.377,-45.606 ccw(c46.284,-45.642) 46.377,-45.605 ccw(c35.9,-49.9) 46.09,-44.963 ccw(c46,-45.007) 46.087,-44.958 cw(c47.046,-44.419) 46.033,-44.846 ccw(c35.9,-49.9) 45.671,-44.177 ccw(c45.585,-44.229) 45.665,-44.169 cw(c46.085,-43.851) 45.605,-44.069 ccw(c45.515,-44.111) 45.6,-44.059 ccw(c35.9,-49.9) 45.386,-43.718 ccw(c35.9,-49.9) 44.046,-42.036 ; 43.911,-41.901 ccw(c44.054,-41.76) 43.914,-41.903 44.046,-42.036
33: Designator8.40 pad.33 | length 80
  Top w0.1: 40.137,-38.862 40.041,-38.766 cw(c40.595,-38.211) 39.811,-38.211 39.811,-31.16 50.592,-20.379 67.746,-20.379 69.034,-19.091 69.034,-15.864 69.034,-15.533 67.27,-13.769 55.756,-13.769 Designator8.40@53.212,-16.312 ; 40.138,-38.862 ccw(c40.28,-38.722) 40.14,-38.865 40.23,-38.955 cw(c40.159,-39.025) 40.233,-38.958 ccw(c40.754,-38.491) 40.26,-38.986 40.452,-39.178 ccw(c40.595,-39.039) 40.454,-39.181 40.466,-39.193 40.476,-39.203 cw(c40.406,-39.274) 40.479,-39.205 ccw(c41.56,-38.199) 40.967,-39.552 40.982,-39.558 cw(c40.942,-39.65) 40.986,-39.56 cw(c35.9,-49.9) 41.519,-39.84 cw(c35.9,-49.9) 41.941,-40.087 cw(c41.888,-40.172) 41.942,-40.088 41.952,-40.094 ccw(c42.221,-39.673) 41.97,-40.105 cw(c41.919,-40.192) 41.971,-40.106 cw(c35.9,-49.9) 43.545,-41.278 cw(c35.9,-49.9) 43.903,-41.61 cw(c43.834,-41.682) 43.905,-41.611 43.98,-41.687 ; 43.981,-41.688 44.052,-41.759 cw(c43.982,-41.83) 44.054,-41.76 44.189,-41.896 cw(c35.9,-49.9) 45.778,-43.967 cw(c45.692,-44.018) 45.784,-43.979 ccw(c46.085,-43.851) 45.828,-44.053 cw(c45.751,-44.116) 45.837,-44.065 cw(c35.9,-49.9) 46.213,-44.761 cw(c46.124,-44.805) 46.216,-44.765 ccw(c47.046,-44.419) 46.26,-44.858 ccw(c46.348,-44.81) 46.262,-44.861 46.264,-44.864 cw(c46.177,-44.914) 46.267,-44.869 cw(c35.9,-49.9) 46.537,-45.468 cw(c35.9,-49.9) 46.562,-45.53 46.57,-45.549 ccw(c46.663,-45.512) 46.57,-45.55 46.578,-45.569 cw(c35.9,-49.9) 47.3,-48.221 cw(c35.9,-49.9) 47.38,-48.908 cw(c47.281,-48.916) 47.381,-48.917 cw(c45.235,-48.884) 46.752,-50.402 46.746,-50.408 cw(c45.127,-48.789) 45.127,-51.079 pad.33
34: Designator9.10 pad.34 | length 89.7
  Top w0.1: Designator9.10@15.682,-3.538 14.31,-4.91 14.31,-7.203 13.218,-8.295 5.115,-8.295 1.962,-11.448 1.962,-19.943 2.868,-20.849 21.366,-20.849 31.509,-30.991 31.509,-38.198 cw(c30.145,-37.903) 30.592,-39.225 ccw(c30.625,-39.32) 30.58,-39.23 ccw(c35.9,-49.9) 30.405,-39.319 cw(c30.266,-39.053) 30.396,-39.324 ccw(c30.438,-39.414) 30.393,-39.325 ccw(c35.9,-49.9) 30.357,-39.344 ccw(c35.9,-49.9) 23.982,-50.239 ; 23.982,-50.241 ccw(c35.9,-49.9) 24.004,-50.702 ccw(c35.9,-49.9) 24.213,-52.262 ccw(c24.311,-52.241) 24.24,-52.311 24.62,-52.692 ccw(c26.416,-50.896) 26.416,-53.436 pad.34 ; 24,-50.632 cw(c24.099,-50.62) 23.999,-50.627
35: Designator9.12 pad.35 | length 93.1
  Top w0.1: Designator9.12@18.233,-3.527 16.774,-4.986 16.774,-7.279 15.021,-9.031 5.623,-9.031 2.162,-12.492 2.162,-19.86 2.951,-20.649 21.449,-20.649 31.785,-30.985 31.785,-38.028 cw(c30.658,-38.028) 31.455,-38.826 31.428,-38.852 ccw(c31.5,-38.923) 31.42,-38.862 cw(c30.145,-37.903) 30.669,-39.41 ccw(c30.702,-39.504) 30.658,-39.415 ccw(c35.9,-49.9) 30.498,-39.496 cw(c30.266,-39.053) 30.483,-39.504 ccw(c35.9,-49.9) 29.914,-39.821 ccw(c35.9,-49.9) 24.184,-50.314 ccw(c24.284,-50.309) 24.188,-50.338 24.188,-50.416 ccw(c35.9,-49.9) 24.193,-50.516 ccw(c24.293,-50.509) 24.2,-50.545 24.2,-50.628 ccw(c35.9,-49.9) 24.226,-50.973 ccw(c24.326,-50.962) 24.236,-51.006 ; 24.236,-51.007 ccw(c24.62,-50.814) 24.316,-51.118 24.445,-51.246 24.717,-51.518 ccw(c26.513,-49.722) 26.513,-52.262 28.608,-52.262 cw(c28.608,-54.802) 30.404,-53.006 pad.35
36: Designator8.2 pad.36 | length 66.5
  Bottom w0.1: Designator8.2 6.69,-17.196 6.69,-20.411 7.858,-21.579 22.08,-21.579 30.488,-29.986 30.488,-37.463 ccw(c30.588,-37.462) 30.488,-37.468 cw(c13.311,-38.573) 30.519,-38.196 cw(c30.242,-38.201) 30.321,-38.467 ccw(c30.35,-38.563) 30.307,-38.472 ccw(c35.9,-49.9) 28.902,-39.275 ccw(c35.9,-49.9) 23.832,-45.869 ccw(c35.9,-49.9) 23.803,-45.957 ccw(c35.9,-49.9) 23.482,-47.132 ccw(c23.579,-47.154) 23.479,-47.153 23.479,-48.594 ccw(c26.019,-48.594) 24.222,-50.389 25.537,-51.703 ccw(c26.886,-50.354) 26.886,-52.262 31.141,-52.262 cw(c31.141,-54.802) 32.937,-53.006 pad.36
37: Designator8.24 pad.37 | length 57
  Bottom w0.1: Designator8.24 32.141,-17.063 32.141,-28.339 40.929,-37.128 40.929,-38.188 ccw(c41.56,-38.199) 41.328,-38.786 cw(c41.29,-38.879) 41.333,-38.788 cw(c35.9,-49.9) 47.92,-46.983 cw(c35.9,-49.9) 48.267,-49.685 48.267,-50.115 cw(c35.9,-49.9) 47.934,-52.76 cw(c47.837,-52.736) 47.915,-52.798 cw(c45.933,-51.21) 47.729,-53.006 46.847,-53.888 cw(c45.13,-52.171) 45.13,-54.599 38.115,-54.599 cw(c38.115,-52.059) 36.319,-53.855 pad.37
38: Designator8.22 pad.38 | length 52.5
  Bottom w0.1: Designator8.22 31.811,-16.916 31.811,-28.292 40.729,-37.211 40.729,-37.679 ; pad.38 38.888,-52.981 cw(c40.684,-54.777) 40.684,-52.237 45.846,-52.237 ccw(c45.846,-49.697) 47.642,-51.493 47.979,-51.156 ccw(c47.908,-51.086) 48.007,-51.101 48.014,-51.054 ; 40.729,-37.68 40.729,-38.187 ccw(c41.56,-38.199) 41.247,-38.969 cw(c41.209,-39.061) 41.252,-38.971 cw(c35.9,-49.9) 44.209,-41.009 cw(c35.9,-49.9) 47.334,-45.735 cw(c35.9,-49.9) 48.067,-49.686 48.067,-50.114 cw(c35.9,-49.9) 48.066,-50.167 cw(c47.966,-50.164) 48.065,-50.177 48.058,-50.23 ccw(c48.158,-50.243) 48.058,-50.243 48.058,-50.427 cw(c35.9,-49.9) 48.019,-50.998 cw(c47.92,-50.989) 48.019,-51.001 48.016,-51.025 ccw(c48.115,-51.037) 48.015,-51.036 cw(c47.915,-51.036) 48.015,-51.044 cw(c35.9,-49.9) 48.015,-51.049 cw(c47.915,-51.039) 48.014,-51.054
39: Designator8.38 pad.39 | length 88.7
  Top w0.1: 40.28,-38.722 40.183,-38.625 cw(c40.525,-38.282) 40.04,-38.282 40.04,-38.146 40.04,-31.214 50.675,-20.579 67.829,-20.579 69.234,-19.174 69.234,-15.864 69.234,-15.45 67.353,-13.569 53.416,-13.569 Designator8.38@50.716,-16.268 ; 40.281,-38.723 40.375,-38.817 cw(c40.304,-38.888) 40.379,-38.821 40.382,-38.825 ccw(c40.754,-38.491) 40.401,-38.845 40.594,-39.038 ; 40.595,-39.039 40.62,-39.064 cw(c40.55,-39.135) 40.623,-39.066 ccw(c41.56,-38.199) 41.067,-39.377 cw(c35.9,-49.9) 42.047,-39.918 ccw(c42.102,-39.834) 42.049,-39.919 42.06,-39.926 ccw(c42.221,-39.673) 42.072,-39.933 cw(c42.022,-40.02) 42.074,-39.935 cw(c35.9,-49.9) 43.146,-40.685 cw(c35.9,-49.9) 44.049,-41.473 cw(c43.979,-41.544) 44.051,-41.474 44.057,-41.481 44.332,-41.756 cw(c35.9,-49.9) 44.881,-42.366 cw(c35.9,-49.9) 45.958,-43.878 cw(c45.872,-43.929) 45.966,-43.895 ccw(c46.085,-43.851) 45.996,-43.941 cw(c35.9,-49.9) 46.396,-44.678 cw(c46.306,-44.722) 46.398,-44.683 ccw(c47.046,-44.419) 46.435,-44.76 46.441,-44.771 cw(c46.354,-44.821) 46.444,-44.776 cw(c35.9,-49.9) 46.846,-45.704 cw(c35.9,-49.9) 47.154,-46.618 cw(c35.9,-49.9) 47.621,-50.139 ccw(c47.882,-50.15) 47.62,-50.15 cw(c35.9,-49.9) 47.538,-51.307 cw(c47.439,-51.294) 47.532,-51.331 cw(c46.286,-50.814) 47.24,-51.768 47.203,-51.805 cw(c46.039,-50.641) 46.039,-52.287 43.558,-52.287 cw(c43.559,-52.187) 43.555,-52.287 ccw(c43.5,-53.436) 43.444,-52.287 ccw(c43.5,-53.436) 43.436,-52.287 ; pad.39 41.371,-53.032 cw(c43.167,-54.828) 43.167,-52.288 43.432,-52.288
40: Designator9.40 pad.40 | length 90.3
  Top w0.1: pad.40 45.601,-53.436 ccw(c45.601,-50.99) 47.33,-52.72 47.458,-52.591 ccw(c47.155,-52.288) 47.537,-52.483 ccw(c47.447,-52.439) 47.545,-52.461 ccw(c35.9,-49.9) 47.58,-52.296 ccw(c47.482,-52.277) 47.582,-52.278 47.582,-52.275 cw(c47.682,-52.275) 47.585,-52.25 47.595,-52.208 ccw(c47.498,-52.184) 47.596,-52.206 47.6,-52.19 47.609,-52.147 ccw(c47.512,-52.125) 47.61,-52.145 ccw(c35.9,-49.9) 47.627,-52.051 47.629,-52.042 47.631,-52.028 ccw(c35.9,-49.9) 47.703,-51.589 ccw(c47.604,-51.576) 47.704,-51.576 47.704,-51.564 cw(c47.804,-51.564) 47.706,-51.543 47.714,-51.505 ccw(c47.616,-51.484) 47.715,-51.498 ccw(c35.9,-49.9) 47.737,-51.329 ccw(c35.9,-49.9) 47.595,-47.577 ccw(c35.9,-49.9) 46.62,-44.682 ccw(c46.531,-44.726) 46.616,-44.674 cw(c47.046,-44.419) 46.581,-44.602 ccw(c46.488,-44.64) 46.578,-44.596 ccw(c35.9,-49.9) 45.586,-42.947 ccw(c35.9,-49.9) 43.621,-40.815 ccw(c35.9,-49.9) 42.174,-39.761 cw(c42.221,-39.673) 42.167,-39.757 42.154,-39.749 ccw(c35.9,-49.9) 41.151,-39.196 ccw(c41.108,-39.286) 41.146,-39.193 cw(c41.56,-38.199) 40.767,-38.928 ccw(c40.694,-38.996) 40.764,-38.925 40.543,-38.704 cw(c40.754,-38.491) 40.531,-38.691 40.524,-38.684 ccw(c40.449,-38.75) 40.52,-38.679 40.323,-38.483 cw(c40.394,-38.412) 40.294,-38.412 40.294,-31.243 50.758,-20.779 67.912,-20.779 69.434,-19.257 69.434,-13.864 67.396,-11.825 58.506,-11.825 54.899,-8.219 54.899,-4.949 Designator9.40@53.452,-3.502
41: Designator9.6 pad.41 | length 90.1
  Top w0.1: Designator9.6@10.661,-3.479 9.096,-5.044 3.388,-5.044 1.562,-6.869 1.562,-17.058 1.562,-20.109 2.702,-21.249 21.2,-21.249 31.023,-31.072 31.023,-38.054 cw(c30.199,-38.062) 30.451,-38.847 ccw(c35.9,-49.9) 30.297,-38.925 ccw(c35.9,-49.9) 23.589,-50.437 ; 23.582,-50.252 ccw(c35.9,-49.9) 23.589,-50.437 ; pad.41 26.452,-55.793 cw(c26.452,-53.278) 24.749,-55.129 cw(c24.818,-55.056) 24.728,-55.099 cw(c35.9,-49.9) 24.626,-54.875 cw(c35.9,-49.9) 23.604,-50.713 cw(c35.9,-49.9) 23.589,-50.445 ; 23.589,-50.445 cw(c35.9,-49.9) 23.589,-50.437 ; 23.589,-50.445 23.589,-50.437
42: Designator9.8 pad.42 | length 93
  Top w0.1: Designator9.8 11.795,-4.885 11.795,-7.025 11.059,-7.761 4.683,-7.761 1.762,-10.682 1.762,-20.026 2.785,-21.049 21.283,-21.049 31.277,-31.043 31.277,-37.98 cw(c30.174,-37.989) 30.515,-39.039 ccw(c35.9,-49.9) 30.312,-39.142 cw(c30.266,-39.053) 30.309,-39.144 ccw(c30.394,-39.325) 30.302,-39.147 ccw(c35.9,-49.9) 23.812,-48.98 ccw(c35.9,-49.9) 23.789,-50.431 ; 23.782,-50.246 ccw(c35.9,-49.9) 24.14,-52.846 ccw(c35.9,-49.9) 24.346,-53.571 ccw(c24.441,-53.54) 24.37,-53.61 24.641,-53.881 ccw(c26.437,-52.084) 26.437,-54.624 29.869,-54.624 cw(c29.869,-57.164) 31.665,-55.368 pad.42
43: Designator9.4 pad.43 | length 94.4
  Top w0.1: Designator9.4@8.206,-3.394 6.912,-4.688 2.702,-4.688 1.362,-6.028 1.362,-20.192 2.619,-21.449 21.117,-21.449 30.769,-31.101 30.769,-38.124 cw(c30.222,-38.135) 30.381,-38.659 ccw(c35.9,-49.9) 30.077,-38.813 ccw(c35.9,-49.9) 28.798,-39.585 ccw(c35.9,-49.9) 24.912,-43.892 ccw(c35.9,-49.9) 24.264,-54.53 ccw(c35.9,-49.9) 24.814,-55.724 ccw(c24.902,-55.677) 24.83,-55.747 25.301,-56.217 ccw(c27.097,-54.421) 27.097,-56.961 32.41,-56.961 ccw(c32.41,-54.421) 34.206,-56.217 pad.43
44: Designator9.46 pad.44 | length 93.8
  Top w0.1: pad.44 37.594,-56.217 ccw(c39.39,-54.421) 39.39,-56.961 45.101,-56.961 ccw(c45.101,-54.706) 46.611,-56.38 ccw(c46.543,-56.307) 46.629,-56.359 ccw(c35.9,-49.9) 41.392,-38.646 cw(c41.56,-38.199) 41.202,-38.515 ccw(c41.129,-38.582) 41.199,-38.511 41.085,-38.398 cw(c41.156,-38.327) 41.056,-38.327 41.056,-31.329 51.006,-21.379 68.16,-21.379 70.034,-19.505 70.034,-13.615 67.82,-11.401 67.645,-11.225 63.789,-11.225 62.545,-9.981 62.545,-4.975 Designator9.46
45: Designator9.42 pad.45 | length 93.6
  Top w0.1: pad.45 40.16,-55.343 cw(c41.956,-57.139) 41.956,-54.599 46.279,-54.599 ccw(c46.279,-53.472) 47.076,-54.269 47.273,-54.072 ccw(c47.202,-54.002) 47.296,-54.036 ccw(c35.9,-49.9) 47.616,-53.014 ccw(c35.9,-49.9) 47.616,-46.785 ccw(c35.9,-49.9) 46.796,-44.586 ccw(c46.707,-44.63) 46.792,-44.578 cw(c47.046,-44.419) 46.767,-44.529 46.763,-44.518 46.761,-44.514 ccw(c35.9,-49.9) 42.719,-39.876 ccw(c35.9,-49.9) 41.233,-39.013 ccw(c41.19,-39.103) 41.229,-39.011 41.217,-39.006 cw(c41.56,-38.199) 40.911,-38.789 ; 40.911,-38.789 40.683,-38.561 cw(c40.754,-38.491) 40.68,-38.558 40.669,-38.545 ccw(c40.595,-38.612) 40.665,-38.542 40.577,-38.454 cw(c40.648,-38.383) 40.548,-38.383 40.548,-31.271 50.841,-20.979 67.995,-20.979 69.634,-19.339 69.634,-13.781 67.479,-11.625 60.084,-11.625 57.414,-8.955 57.414,-4.924 Designator9.42
46: Designator9.44 pad.46 | length 89.6
  Top w0.1: pad.46 45.135,-55.793 ccw(c45.135,-53.253) 46.931,-55.049 47.215,-54.765 ccw(c47.143,-54.695) 47.235,-54.735 ccw(c35.9,-49.9) 48.204,-49.223 ccw(c35.9,-49.9) 46.967,-44.48 cw(c47.046,-44.419) 46.953,-44.456 46.947,-44.441 ccw(c46.854,-44.477) 46.944,-44.433 ccw(c35.9,-49.9) 41.315,-38.831 ccw(c41.272,-38.921) 41.308,-38.828 cw(c41.56,-38.199) 41.057,-38.653 ccw(c40.983,-38.72) 41.055,-38.65 40.831,-38.427 cw(c40.902,-38.356) 40.802,-38.356 40.802,-31.3 50.924,-21.179 68.078,-21.179 69.834,-19.422 69.834,-13.698 67.562,-11.425 62.094,-11.425 59.954,-9.285 59.954,-4.924 Designator9.44@58.52,-3.49
47: Designator9.2 pad.47 | length 90.3
  Top w0.1: Designator9.2@5.692,-3.685 2.689,-3.685 1.162,-5.212 1.162,-18.86 1.162,-20.275 2.537,-21.649 21.035,-21.649 30.517,-31.132 30.517,-38.112 ; 30.517,-38.113 cw(c13.311,-38.573) 30.519,-38.196 cw(c30.242,-38.201) 30.321,-38.467 ccw(c30.35,-38.563) 30.307,-38.472 ccw(c35.9,-49.9) 23.354,-47.786 ccw(c35.9,-49.9) 25.182,-56.756 ccw(c25.266,-56.701) 25.195,-56.771 25.829,-57.406 ccw(c27.625,-55.61) 27.625,-58.15 pad.47
50: Designator9.48 pad.50 | length 88.6
  Top w0.1: pad.50 44.276,-58.15 ccw(c44.276,-55.61) 46.072,-57.406 46.408,-57.07 ccw(c46.337,-57) 46.419,-57.057 ccw(c35.9,-49.9) 47.337,-55.474 ccw(c35.9,-49.9) 47.379,-44.414 ccw(c35.9,-49.9) 41.475,-38.463 ccw(c41.432,-38.554) 41.466,-38.46 cw(c41.56,-38.199) 41.307,-38.311 41.294,-38.284 cw(c41.385,-38.242) 41.285,-38.243 41.285,-38.234 ccw(c41.185,-38.235) 41.284,-38.226 cw(c41.56,-38.199) 41.283,-38.192 cw(c58.565,-38.573) 41.287,-38.06 ccw(c41.187,-38.058) 41.287,-38.058 41.287,-31.382 51.089,-21.579 68.243,-21.579 70.234,-19.588 70.234,-13.532 65.085,-8.383 65.085,-4.975 Designator9.48@63.645,-3.535
GND: Designator8.1 Designator8.3 Designator8.5 Designator8.7 Designator8.9 Designator8.11 Designator8.13 Designator8.15 Designator8.17 Designator8.19 Designator8.21 Designator8.23 Designator8.25 Designator8.27 Designator8.29 Designator8.31 Designator8.33 Designator8.35 Designator8.37 Designator8.39 Designator8.41 Designator8.43 Designator8.45 Designator8.47 Designator8.49 Designator8.50 Designator9.1 Designator9.3 Designator9.5 Designator9.7 Designator9.9 Designator9.11 Designator9.13 Designator9.15 Designator9.17 Designator9.19 Designator9.21 Designator9.23 Designator9.25 Designator9.27 Designator9.29 Designator9.31 Designator9.33 Designator9.35 Designator9.37 Designator9.39 Designator9.41 Designator9.43 Designator9.45 Designator9.47 Designator9.49 Designator9.50 pad.48 pad.49 | length 195.5
  Top w1: Designator8.1 Designator8.3 Designator8.5 Designator8.7 Designator8.9 Designator8.11 Designator8.13 Designator8.15 Designator8.17 Designator8.19 Designator8.21 Designator8.23
  Bottom w0.254: pad.49 39.164,-60.13 ccw(c40.958,-58.333) 40.958,-60.873 42.12,-60.873 ccw(c42.118,-60.619) 42.245,-60.839 ccw(c35.9,-49.9) 48.543,-50.178 ccw(c35.603,-49.893) 48.544,-50.12 ccw(c35.9,-49.9) 41.45,-38.537 ccw(c41.34,-38.766) 41.432,-38.529 cw(c41.56,-38.199) 41.206,-38.191 41.206,-19.197 41.178,-19.168 41.178,-18.663 Designator8.29 ; Designator9.49 Designator9.50
  Bottom w1: Designator9.1 Designator9.3 Designator9.5 Designator9.7 Designator9.9 Designator9.11 Designator9.13 Designator9.15 Designator9.17 Designator9.19 Designator9.21 Designator9.23 Designator9.25 Designator9.27 Designator9.29 Designator9.31 Designator9.33 Designator9.35 Designator9.37 Designator9.39 Designator9.41 Designator9.43 Designator9.45 Designator9.47 Designator9.49 ; Designator8.23 Designator8.25 Designator8.27 Designator8.29 Designator8.31 Designator8.33 Designator8.35 Designator8.37 Designator8.39 Designator8.41 Designator8.43 Designator8.45 Designator8.47 Designator8.49 Designator8.50 66.339,-3.689 Designator9.50 ; pad.48 pad.49

## Keep-outs
Keep-Out Layer:
  the board outline again, w0.254

## Other copper
Top:
  region: 36.271,-2.489 36.271,-0.406 35.433,-0.406 35.433,-2.489
  region: 36.271,-14.707 36.271,-12.649 35.433,-12.649 35.433,-14.707
  text "R2BGY" at 50.728,-11.447 h1
  text "1 / 2" at 35.235,-25.831 h1 r359.31
Bottom:
  text "47" at 4.768,-2.422 h1 r270
  text "43" at 7.31,-2.422 h1 r270
  text "41" at 9.852,-2.422 h1 r270
  text "42" at 12.394,-2.422 h1 r270
  text "34" at 14.936,-2.422 h1 r270
  text "35" at 17.478,-2.422 h1 r270
  text "26" at 20.02,-2.422 h1 r270
  text "27" at 22.563,-2.422 h1 r270
  text "18" at 25.105,-2.422 h1 r270
  text "19" at 27.647,-2.422 h1 r270
  text "11" at 30.189,-2.422 h1 r270
  text "5" at 32.731,-2.422 h1 r270
  text "6" at 35.273,-2.422 h1 r270
  text "2" at 37.815,-2.422 h1 r270
  text "7" at 40.357,-2.422 h1 r270
  text "3" at 42.9,-2.422 h1 r270
  text "15" at 45.442,-2.422 h1 r270
  text "4" at 47.984,-2.422 h1 r270
  text "10" at 50.526,-2.422 h1 r270
  text "40" at 53.068,-2.422 h1 r270
  text "45" at 55.61,-2.422 h1 r270
  text "46" at 58.152,-2.422 h1 r270
  text "44" at 60.694,-2.422 h1 r270
  text "50" at 63.236,-2.422 h1 r270
  text "36" at 4.869,-14.513 h1 r270
  text "28" at 7.407,-14.513 h1 r270
  text "29" at 9.945,-14.513 h1 r270
  text "20" at 12.483,-14.513 h1 r270
  text "21" at 15.021,-14.513 h1 r270
  text "14" at 17.558,-14.513 h1 r270
  text "22" at 20.096,-14.513 h1 r270
  text "23" at 22.634,-14.513 h1 r270
  text "30" at 25.172,-14.513 h1 r270
  text "31" at 27.709,-14.513 h1 r270
  text "38" at 30.247,-14.513 h1 r270
  text "37" at 32.785,-14.513 h1 r270
  text "12" at 35.323,-14.513 h1 r270
  text "1" at 37.861,-14.513 h1 r270
  text "13" at 40.398,-14.513 h1 r270
  text "8" at 42.936,-14.513 h1 r270
  text "9" at 45.474,-14.513 h1 r270
  text "16" at 48.012,-14.513 h1 r270
  text "39" at 50.55,-14.513 h1 r270
  text "33" at 53.087,-14.513 h1 r270
  text "32" at 55.625,-14.513 h1 r270
  text "25" at 58.163,-14.513 h1 r270
  text "24" at 60.701,-14.513 h1 r270
  text "17" at 63.239,-14.513 h1 r270
  text "1" at 30.621,-41.013 h1
  text "4" at 41.811,-41.216 h1
  text "5" at 28.222,-43.502 h1
  text "10" at 45.225,-44.442 h1
  text "34" at 26.893,-54.983 h1
  text "46" at 45.283,-57.243 h1
  text "41" at 28.403,-57.421 h1
  text "50" at 42.743,-59.504 h1
  text "47" at 31.008,-60.012 h1
  text "G" at 35.004,-60.749 h1
  text "G" at 37.519,-60.749 h1

## Silkscreen, mask and mechanical layers (free items; w line width, h text height)
Top Solder:
  region: 55.702,-11.925 55.702,-9.943 50.344,-9.943 50.344,-11.925
  rectangle: 34.9,-26.314 36.881,-22.682
Bottom Solder:
  rectangle: 4.064,-15.138 65.075,-12.421
  rectangle: 4.115,-2.921 65.024,0